# EAGLE board ICM20602-pan (EAGLE 7.2.0)
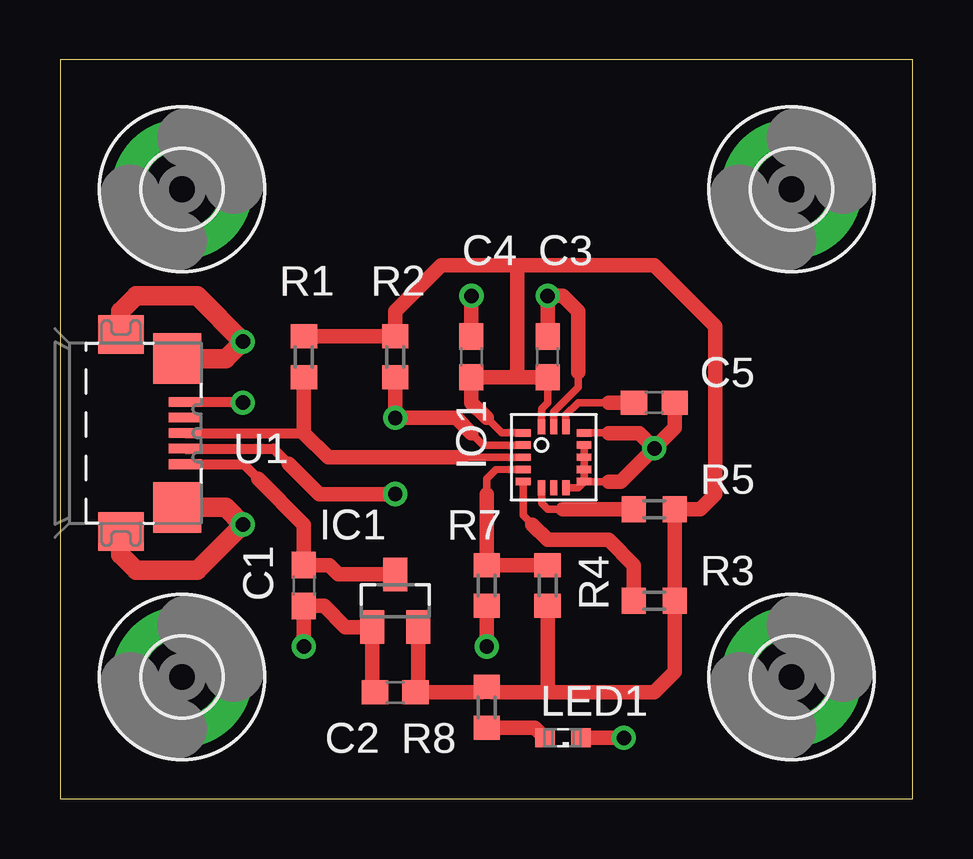
[diagram p0: board, top side]
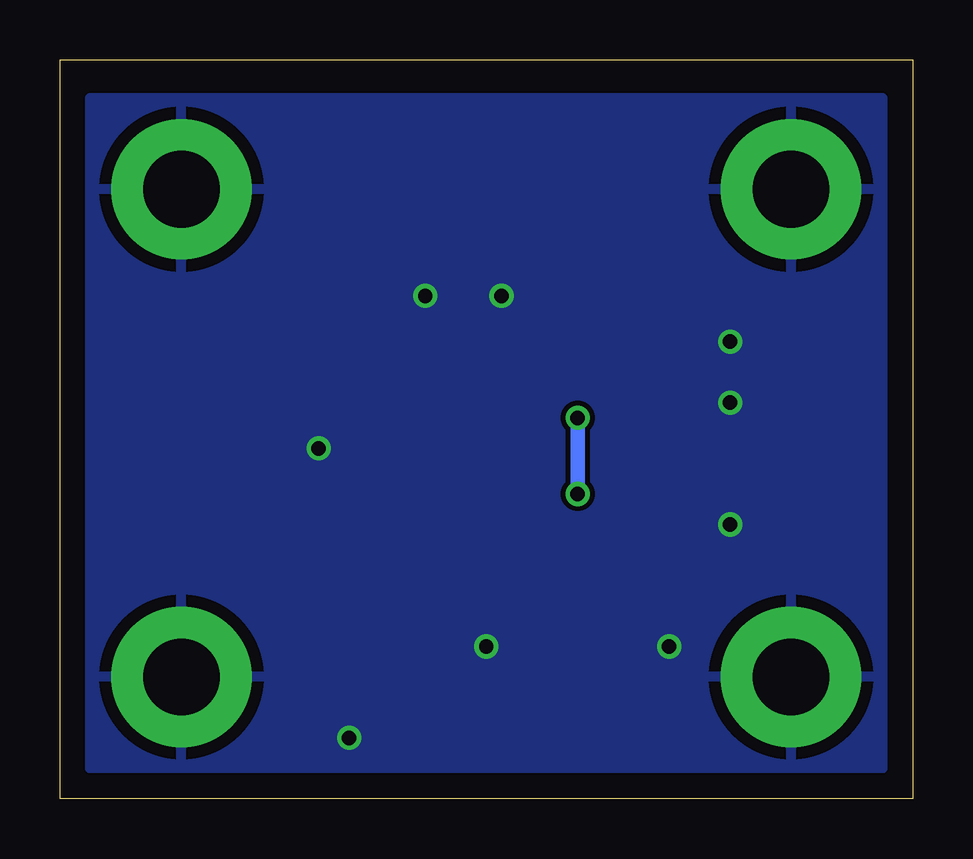
[diagram p1: board, bottom side, seen from below]

Size 35.54 x 30.79 mm. Coordinates in mm from the lower left corner, seen from the top.
Outline: 0,0 35.54,0 35.54,30.79 0,30.79 0,0
Copper layers (1*16): Top 0.035mm / dielectric 1.5mm / Bottom 0.035mm
Design rules "default *": minimum track width 10mil, minimum drill 24mil, track to track 8mil, track to pad 8mil, pad to pad 8mil, via to via 8mil, smd to smd 8mil, copper to edge 40mil, drill to drill 8mil, minimum pad ring 10mil, minimum via ring 8mil, stop-mask expansion 4mil, vias tented up to drill 0mil, thermal gap 20mil

## Footprints (pad centres in the part's own frame; a part is rotated, then mirrored left to right if it is on the bottom)
C0603 = smd 1.1 x 1: 1 -0.85,0; 2 0.85,0
3,2-PAD = drill 3.2 pad 5.842: B3,2 0,0
SOT23 = smd 1 x 1.4: 1 -0.95,-1.1; 2 0.95,-1.1; 3 0,1.1
LGA16 = smd 0.61 x 0.305: P1 -1.274,1.012; P2 -1.274,0.504; P3 -1.274,-0.004; P4 -1.274,-0.512; P5 -1.274,-1.02; P9 1.266,-1.02; P10 1.266,-0.512; P11 1.266,-0.004; P12 1.266,0.504; P13 1.266,1.012 | smd 0.305 x 0.61: P6 -0.512,-1.274; P7 -0.004,-1.274; P8 0.504,-1.274; P14 0.504,1.266; P15 -0.004,1.266; P16 -0.512,1.266
SML0603 = smd 0.8 x 0.8: A 0.75,0; C -0.75,0
R0603 = smd 1 x 1.1: 1 -0.85,0; 2 0.85,0
ZX62R-B-5P = smd 1.35 x 0.4: 1 2.675,-1.3; 2 2.675,-0.65; 3 2.675,0; 4 2.675,0.65; 5 2.675,1.3 | smd 1.9 x 1.6: M1 0,-4.1; M2 0,4.1 | smd 2 x 2.1: M3 2.35,3.1; M4 2.35,-3.1

## Placement (x,y rotation side)
C1  2u2  [C0603]  10.16,8.89 270 top
C2  2u2  [C0603]  13.97,4.45 180 top
C3  100n  [C0603]  20.32,18.41 90 top
C4  100n  [C0603]  17.14,18.41 90 top
C5  100n  [C0603]  24.77,16.51 0 top
H1  MOUNT-PAD-ROUND3.2  [3,2-PAD]  5.08,25.4 0 top
H2  MOUNT-PAD-ROUND3.2  [3,2-PAD]  30.48,25.4 0 top
H3  MOUNT-PAD-ROUND3.2  [3,2-PAD]  30.48,5.08 0 top
H4  MOUNT-PAD-ROUND3.2  [3,2-PAD]  5.08,5.08 0 top
IC1  MCP1703CB  [SOT23]  13.97,8.26 0 top
IO1  [LGA16]  20.57,14.24 0 top
LED1  [SML0603]  20.95,2.54 180 top
R1  10k  [R0603]  10.16,18.41 90 top
R2  10k  [R0603]  13.97,18.41 90 top
R3  10k  [R0603]  24.77,8.26 0 top
R4  10k  [R0603]  20.32,8.89 270 top
R5  10k  [R0603]  24.77,12.06 0 top
R7  0R  [R0603]  17.78,8.89 90 top
R8  220R  [R0603]  17.78,3.81 90 top
U1  MICRO-USB  [ZX62R-B-5P]  2.54,15.24 0 top

## Library data of the parts
C1-C5 R1-R5 R7 R8 = rcl
H1-H4 = holes
IC1 = linear
IO1 = gyro
LED1 = led
U1 = con-hirose

## Nets
+3V3: C2.1 C3.1 C4.1 IC1.2 IO1.P1 IO1.P16 R1.2 R2.2 R3.2 R4.2 R5.2 R8.2
+5V: C1.1 IC1.3 U1.1
GND: C1.2 C2.2 C3.2 C4.2 C5.2 H1.B3,2 H2.B3,2 H3.B3,2 H4.B3,2 IC1.1 IO1.P8 IO1.P9 IO1.P10 IO1.P11 IO1.P12 IO1.P13 IO1.P15 LED1.C R7.1 U1.5 U1.M1 U1.M2 U1.M3 U1.M4
N$1: IO1.P2 R2.1 U1.2
N$2: IO1.P3 R1.1 U1.3
N$3: C5.1 IO1.P14
N$4: IO1.P5 R3.1
N$5: IO1.P4 R4.1 R7.2
N$8: IO1.P6 R5.1
N$9: LED1.A R8.1

## Tracks (layer width: path | path; a pad name or v marks a point on that pad's centre or on a via)
+3V3
  Top 0.305: IO1.P16 20.07,16.26 20.32,16.51 C3.1 | IO1.P1 18.41,15.25 17.78,15.88
  Top 0.61: 19.05,22.23 24.77,22.23 27.3,19.68 27.3,12.7 26.67,12.06 R5.2 R3.2 25.61,5.29 24.77,4.45 20.32,4.45 | 19.05,22.23 15.88,22.23 13.97,20.32 R2.2 R1.2 | 19.05,17.57 19.05,22.23 | C3.1 19.05,17.57 | 19.05,17.57 C4.1 17.14,16.51 17.78,15.88 | R4.2 20.32,4.45 | IC1.2 14.92,4.54 C2.1 17.57,4.45 R8.2 18,4.45 20.32,4.45
+5V
  Top 0.406: U1.1 7.65,13.94 8.26,13.34
  Top 0.61: IC1.3 11.6,9.36 11.21,9.74 C1.1 10.16,11.43 8.26,13.34
GND  (via drill 0.6)
  Top 0.305: 21.59,17.78 21.59,17.14 20.57,16.12 IO1.P15 | IO1.P8 21.59,12.95 IO1.P9 | IO1.P9 IO1.P10 IO1.P11 IO1.P12 | IO1.P9 22.85,13.22 22.86,13.21 | IO1.P13 22.85,15.25 22.86,15.24
  Top 0.406: U1.5 7.59,16.54 v7.62,16.51
  Top 0.61: C2.2 13.02,4.54 IC1.1 11.89,7.16 11.01,8.04 C1.2 v10.16,6.35 | R7.1 v17.78,6.35 | LED1.C v23.5,2.54 | C4.2 v17.14,20.95 | C3.2 v20.32,20.95 20.95,20.95 21.59,20.32 21.59,17.78 | C5.2 25.61,15.46 v24.77,14.61 | v24.77,14.61 24.13,15.24 22.86,15.24 | v24.77,14.61 23.37,13.21 22.86,13.21
  Top 0.813: U1.M3 6.91,18.34 v7.62,19.05 5.71,20.95 3.17,20.95 2.54,20.32 U1.M2 | U1.M1 2.54,10.16 3.17,9.53 5.71,9.53 v7.62,11.43 6.91,12.14 U1.M4
  pour Bottom: 1.27,29.21 1.27,1.27 34.29,1.27 34.29,29.21
N$1  (via drill 0.6)
  Top 0.305: IO1.P2 17.64,14.74 17.14,15.24
  Top 0.406: U1.2 8.9,14.59 9.53,13.97
  Top 0.61: R2.1 v13.97,15.88 16.51,15.88 17.14,15.24 | v13.97,12.7 10.79,12.7 9.53,13.97
  Bottom 0.61: v13.97,12.7 v13.97,15.88
N$2
  Top 0.305: IO1.P3 16.76,14.22
  Top 0.406: U1.3 10.16,15.24
  Top 0.61: 16.76,14.22 11.18,14.22 10.16,15.24 R1.1
N$3
  Top 0.305: IO1.P14 21.08,16 21.59,16.51 22.86,16.51
  Top 0.61: C5.1 22.86,16.51
N$4
  Top 0.305: IO1.P5 19.3,11.81 19.68,11.43
  Top 0.61: 19.68,11.43 20.32,10.79 22.86,10.79 23.91,9.74 R3.1
N$5
  Top 0.305: IO1.P4 18.16,13.72 17.78,13.34 17.78,12.7
  Top 0.61: R4.1 R7.2 17.78,12.7
N$8
  Top 0.305: 20.95,12.06 20.32,12.06 20.07,12.32 IO1.P6
  Top 0.61: 20.95,12.06 R5.1
N$9
  Top 0.61: R8.1 19.79,2.96 LED1.A

## Text on the board
_tNames: C4 | C3 | R1 | R2 | C5 | U1 | IO1 | R5 | R7 | IC1 | R4 | R3 | C1 | LED1 | C2 | R8